# Altium PCB CT310高端控制盒基板电路V1.0.PcbDoc (part 5 of 8)
Units mil, origin at the board's own origin, x right, y up, seen from the top; angles counter-clockwise.
Board outline 8162.61 x 6196.81 mil, 2 copper layers (Top Layer, Bottom Layer), stack 65.792 mil thick; 265 components, 178 nets, 926 pads, 298 vias.
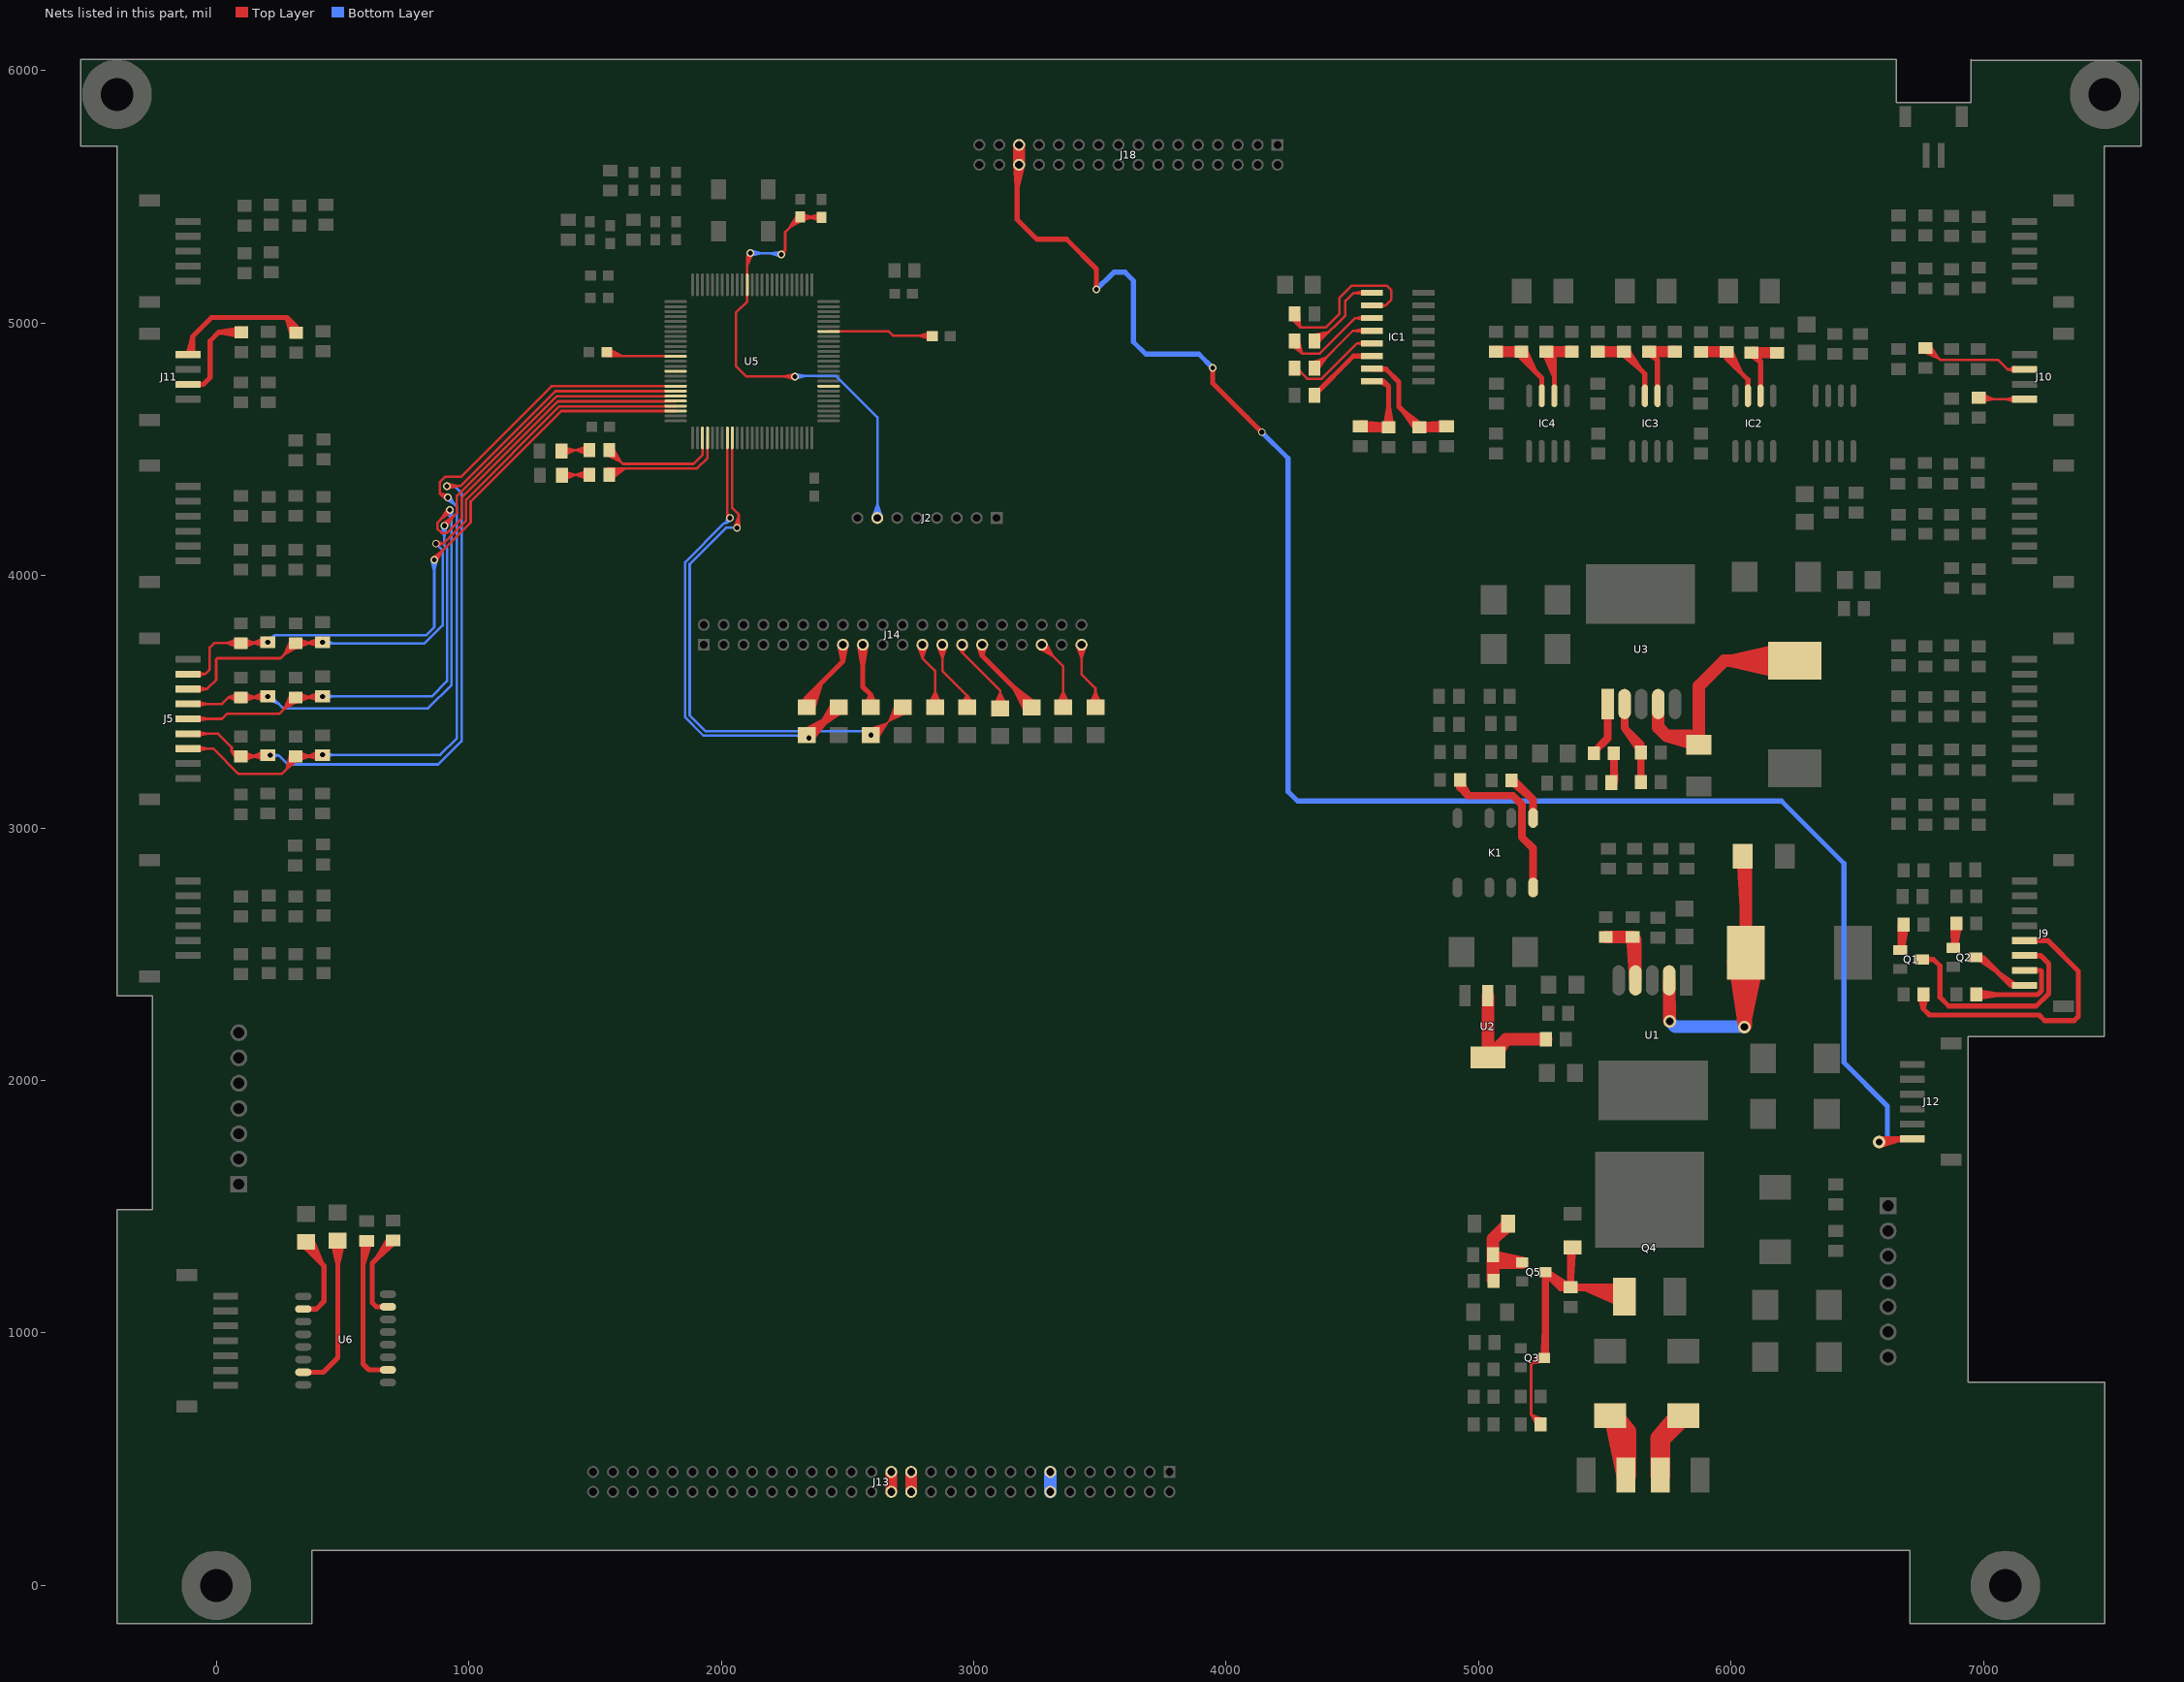
[diagram p5: the nets of this part, all layers, seen from the top]

## Via types
v1: diameter 30, hole 20, Top Layer to Bottom Layer, tented both sides, 226 vias
v2: diameter 60, hole 30, Top Layer to Bottom Layer, tented both sides, 32 vias
v3: diameter 50, hole 30, Top Layer to Bottom Layer, tented both sides, 20 vias
v4: diameter 80, hole 50, Top Layer to Bottom Layer, tented both sides, 10 vias
v5: diameter 50, hole 28, Top Layer to Bottom Layer, tented both sides, 8 vias
v6: diameter 24, hole 16, Top Layer to Bottom Layer, tented both sides, 1 vias
v7: diameter 30, hole 16, Top Layer to Bottom Layer, tented both sides, 1 vias

## Nets (pads, with @x,y where several pads share a name; then routed paths per layer and width w, separated by ;. In a path a pad name is that pad's centre, name@x,y a point inside that pad or via, vN(x,y) a via of type N, cw(c..) or ccw(c..) an arc to the next point about the centre after c; other vN are vias at no path point) (continued)
KJ_B3: C42.1 J5.3 R41.1 U5.43 | length 5962.4
  Top Layer w10: J5.3@-111.93,3314.19 -12.19,3314.19 88,3214 259,3214 305,3260 ; J5.3@-76.5,3314.19 -32.72,3314.19 ; J5.3@-75.62,3305.45 -32.72,3314.19 ; J5.3@-75.62,3322.92 -32.72,3314.19 ; R41.1@292.86,3291.19 278.55,3233.55 ; R41.1@302.38,3287.95 278.55,3233.55 ; R41.1@313.94,3283.93 R41.1@333.93,3283.93 ; R41.1@316.97,3278.84 278.55,3233.55 ; R41.1@317.88,3283.93 371.5,3283.93 ; R41.1@318.57,3275.33 371.5,3283.93 ; R41.1@318.57,3292.52 371.5,3283.93 ; R41.1@321.11,3265.59 371.5,3283.93 ; R41.1@321.11,3302.26 371.5,3283.93 ; R41.1@324.06,3271.71 278.55,3233.55 ; C42.1@410.77,3286.65 C42.1@409.84,3305.92 ; C42.1@412.52,3269.33 360.64,3283.93 ; C42.1@413.07,3296.38 360.64,3283.93 ; C42.1@414.33,3279.24 360.64,3283.93 ; C42.1@414.39,3287.86 360.64,3283.93 ; C42.1@417.92,3299.42 371.73,3282.96 ; C42.1@417.98,3299.43 374.31,3283.93 ; C42.1@418.16,3299.47 375.39,3285.01 ; C42.1@418.5,3299.54 360.64,3283.93 ; C42.1@418.64,3299.57 372.94,3286.85 ; C42.1@419.84,3279.72 372.94,3286.85 ; C42.1@420.23,3279.71 375.39,3285.01 ; C42.1@420.3,3287.86 416.36,3283.93 R41.1@333.93,3283.93 ; C42.1@420.43,3279.71 360.64,3283.93 ; C42.1@420.46,3279.71 374.31,3283.93 ; C42.1@420.65,3279.71 371.73,3282.96 ; C42.1@427.01,3297.12 C42.1@409.84,3305.92 ; v1@911.32,4300.77 885,4325 ; v1@920.18,4318.48 885,4325 ; 1744.15,4749.87 U5.43@1779.9,4749.87 ; U5.43@1819.15,4749.87 1327.87,4749.87 969,4391 906,4391 885,4370 885,4325 ; 278.55,3233.55 R41.1@310.01,3283.93 ; 305,3260 R41.1@310.01,3283.93 ; 305,3260 301.39,3284.17 305,3260 ; 305,3260 318,3280.7 305,3260 ; 305,3260 291.7,3280.51 305,3260 ; 305,3260 325.41,3273.46 305,3260 ; 305,3260 R41.1@310.01,3283.93 ; 305,3260 310,3260 ; 310,3260 R41.1@310.01,3283.93 ; 310,3260 301.52,3282.37 310,3260 ; 310,3260 318.49,3282.37 310,3260 ; 310,3260 292.85,3276.68 310,3260 ; 310,3260 327.16,3276.67 310,3260 ; 310,3260 R41.1@310.01,3283.93 ; 310,3260 R41.1@333.93,3283.93 ; 360.64,3283.93 v1(420.3,3289.7) ; 360.64,3283.93 C42.1@409.84,3305.92 ; 371.73,3282.96 v1(420.3,3289.7) ; 372.94,3286.85 v1(420.3,3289.7) ; 374.31,3283.93 v1(420.3,3289.7) ; 375.39,3285.01 v1(420.3,3289.7) ; C42.1@409.84,3305.92 v1(420.3,3289.7) ; 885,4325 v1(917,4309) ; 885,4325 901,4309 ; 901,4309 v1(917,4309) ; 901,4309 913.88,4318.5 901,4309 ; 901,4309 913.88,4299.5 901,4309 ; 901,4309 v1(917,4309)
  Bottom Layer w10: v1(420.3,3289.7) 886.7,3289.7 953,3356 953,4271.6 942,4282.6 942,4284 ; v1@421.41,3279.77 465.3,3289.7 v1@421.41,3299.64 ; v1@911,4301 942,4284 ; v1(917,4309) 942,4284 ; v1@925,4315 942,4284
KJ_B4: C46.1 J5.4 R49.1 U5.44 | length 5254.5
  Top Layer w10: J5.4@-111.93,3373.24 6.76,3373.24 60.5,3319.5 60.5,3301.5 ; J5.4@-76.5,3373.24 -32.72,3373.24 ; J5.4@-75.62,3364.5 -32.72,3373.24 ; J5.4@-75.62,3381.98 -32.72,3373.24 ; R49.1@80.75,3270.22 60.5,3301.5 ; R49.1@88.44,3276.84 60.5,3301.5 ; R49.1@93.36,3283.93 60.5,3301.5 ; R49.1@96.52,3291.95 60.5,3301.5 ; R49.1@97.76,3302.02 60.5,3301.5 ; R49.1@101.23,3283.93 154.85,3283.93 ; R49.1@101.93,3275.33 154.85,3283.93 ; R49.1@101.93,3292.52 154.85,3283.93 ; R49.1@104.47,3265.59 154.85,3283.93 ; R49.1@104.47,3302.26 154.85,3283.93 ; C46.1@193.2,3305.92 143.96,3283.93 ; C46.1@195.88,3269.33 143.96,3283.93 ; C46.1@206,3294.86 C46.1@197.68,3279.24 ; C46.1@206.39,3280.49 C46.1@196.43,3296.38 ; C46.1@209.89,3278.4 C46.1@197.74,3287.86 ; C46.1@209.89,3297.32 C46.1@197.74,3287.86 ; C46.1@211.26,3297.68 165.94,3283.93 ; C46.1@211.55,3297.73 168.1,3285.69 ; C46.1@212.51,3277.88 168.1,3285.69 ; C46.1@212.91,3277.86 165.94,3283.93 ; C46.1@215.14,3297.66 C46.1@196.43,3296.38 ; C46.1@215.35,3278.11 C46.1@197.68,3279.24 ; v1(913,4354) 966.18,4354 1342.36,4730.18 U5.44@1819.15,4730.18 ; v1@914.11,4344.06 958,4354 v1@914.11,4363.94 ; 1744.15,4730.18 U5.44@1779.9,4730.18 ; 60.5,3301.5 78.07,3283.93 R49.1@97.3,3283.93 199.71,3283.93 C46.1@203.65,3287.86 v1(213.14,3287.86) ; 143.96,3283.93 v1(213.14,3287.86) ; 143.96,3283.93 211.85,3297.78 144.67,3284.09 ; 143.96,3283.93 212.99,3277.86 144.67,3284.09 ; 143.96,3283.93 C46.1@197.74,3287.86 ; 143.96,3283.93 C46.1@196.43,3296.38 ; 143.96,3283.93 C46.1@197.68,3279.24 ; 144.67,3284.09 v1(213.14,3287.86) ; 165.94,3283.93 v1(213.14,3287.86) ; 168.1,3285.69 v1(213.14,3287.86) ; C46.1@196.43,3296.38 v1(213.14,3287.86) ; C46.1@197.68,3279.24 v1(213.14,3287.86) ; C46.1@197.74,3287.86 v1(213.14,3287.86)
  Bottom Layer w10: v1(213.14,3287.86) 247.14,3287.86 ; v1@214.61,3277.97 247.14,3287.86 ; v1@214.61,3297.75 247.14,3287.86 ; v1(913,4354) 943,4354 ; v1@914.67,4344.14 943,4354 ; v1@914.67,4363.86 943,4354 ; 247.14,3287.86 283.3,3251.7 878.7,3251.7 971,3344 971,4326 943,4354
KJ_B5: C35.1 J5.5 R26.1 U5.45 | length 4777
  Top Layer w10: J5.5@-111.93,3432.3 22.3,3432.3 42,3452 248.95,3452 R26.1@313.94,3516.99 416.36,3516.99 v1(420.3,3520.92) ; J5.5@-76.5,3432.3 -32.72,3432.3 ; J5.5@-75.62,3423.56 -32.72,3432.3 ; J5.5@-75.62,3441.03 -32.72,3432.3 ; R26.1@294.48,3527.28 269.11,3472.15 ; R26.1@303.24,3522.33 269.11,3472.15 ; R26.1@310.01,3516.99 269.11,3472.15 ; R26.1@315.95,3510.74 269.11,3472.15 ; R26.1@317.88,3516.99 371.5,3516.99 ; R26.1@318.57,3508.39 371.5,3516.99 ; R26.1@318.57,3525.58 371.5,3516.99 ; R26.1@321.11,3498.65 371.5,3516.99 ; R26.1@321.11,3535.33 371.5,3516.99 ; R26.1@321.67,3502.48 269.11,3472.15 ; C35.1@409.84,3538.98 360.61,3516.99 ; C35.1@412.52,3502.4 360.61,3516.99 ; C35.1@413.07,3529.45 360.61,3516.99 ; C35.1@414.33,3512.3 360.61,3516.99 ; C35.1@414.39,3520.92 360.61,3516.99 ; C35.1@418.22,3530.71 372.66,3515.94 ; C35.1@418.35,3530.73 374.79,3516.99 ; C35.1@418.56,3530.77 375.35,3518.07 ; C35.1@419.01,3530.84 371.93,3519.68 ; C35.1@419.52,3510.95 371.93,3519.68 ; C35.1@419.82,3510.94 375.35,3518.07 ; C35.1@420.06,3510.93 374.79,3516.99 ; C35.1@420.29,3510.92 372.66,3515.94 ; v1@896.51,4204.61 938.32,4233.72 ; v1(903,4197) 938.32,4233.72 ; v1@903,4198.4 953,4248.4 953,4315.37 1348.13,4710.5 U5.45@1819.15,4710.5 ; v1@910.85,4190.81 938.32,4233.72 ; 1744.15,4710.5 U5.45@1779.9,4710.5 ; 371.93,3519.68 v1(420.3,3520.92) ; 372.66,3515.94 v1(420.3,3520.92) ; 374.79,3516.99 v1(420.3,3520.92) ; 375.35,3518.07 v1(420.3,3520.92)
  Bottom Layer w10: v1(420.3,3520.92) 852.92,3520.92 914,3582 914,4107.46 903,4118.46 v1(903,4197) ; v1@421.41,3510.99 465.3,3520.92 v1@421.41,3530.86 ; v1@893.06,4195.89 903,4152 v1@912.94,4195.89
KJ_B6: C39.1 J5.6 R34.1 U5.46 | length 5062.6
  Top Layer w10: J5.6@-111.93,3491.35 22.37,3491.35 48.01,3516.99 ; J5.6@-76.5,3491.35 -32.72,3491.35 ; J5.6@-75.62,3482.62 -32.72,3491.35 ; J5.6@-75.62,3500.09 -32.72,3491.35 ; R34.1@89.53,3498.76 48.01,3516.99 ; R34.1@89.53,3535.21 48.01,3516.99 ; R34.1@92.54,3508.41 48.01,3516.99 ; R34.1@92.54,3525.57 48.01,3516.99 ; R34.1@93.36,3516.99 48.01,3516.99 ; R34.1@101.23,3516.99 154.85,3516.99 ; R34.1@101.93,3508.39 154.85,3516.99 ; R34.1@101.93,3525.58 154.85,3516.99 ; R34.1@104.47,3498.65 154.85,3516.99 ; R34.1@104.47,3535.33 154.85,3516.99 ; C39.1@193.2,3538.98 143.96,3516.99 ; C39.1@195.88,3502.4 143.96,3516.99 ; C39.1@196.43,3529.45 143.96,3516.99 ; C39.1@197.68,3512.3 143.96,3516.99 ; C39.1@197.74,3520.92 143.96,3516.99 ; C39.1@199.71,3516.99 R34.1@97.3,3516.99 48.01,3516.99 ; C39.1@201.58,3530.71 156.01,3515.94 ; C39.1@201.7,3530.73 158.14,3516.99 ; C39.1@201.91,3530.77 158.7,3518.07 ; C39.1@202.36,3530.84 155.29,3519.68 ; C39.1@202.87,3510.95 155.29,3519.68 ; C39.1@203.17,3510.94 158.7,3518.07 ; C39.1@203.42,3510.93 158.14,3516.99 ; C39.1@203.65,3510.92 156.01,3515.94 ; v1@917.15,4266.19 889.73,4223.33 ; v1@931.49,4252.39 889.73,4223.33 ; 1744.14,4689.88 U5.46@1779.9,4690.81 ; U5.46@1819.15,4690.81 1818.21,4689.88 1352.97,4689.88 971,4307.91 971,4225.4 914.6,4169 891.4,4169 875,4185.4 875,4208.6 884.7,4218.3 925,4258.6 v1(925,4260) 889.73,4223.33 ; 155.29,3519.68 v1(203.65,3520.92) ; 156.01,3515.94 v1(203.65,3520.92) ; 158.14,3516.99 v1(203.65,3520.92) ; 158.7,3518.07 v1(203.65,3520.92)
  Bottom Layer w10: v1@198.89,3512.13 247.41,3491.59 ; v1@209.98,3528.66 247.41,3491.59 ; v1@915.31,4257.52 932,4212.47 ; v1@934.99,4260.42 932,4212.47 ; 247.41,3491.59 v1(203.65,3520.92) 218.08,3520.92 265,3474 839,3474 932,3567 932,4253 v1(925,4260) 932,4212.47
KJ_B7: C43.1 J5.7 R42.1 U5.47 | length 4466.5
  Top Layer w10: J5.7@-111.93,3550.41 -36.59,3550.41 ; J5.7@-76.5,3550.41 -36.59,3550.41 ; J5.7@-75.53,3541.68 -36.59,3550.41 ; J5.7@-75.53,3559.13 -36.59,3550.41 ; R42.1@294.48,3742.28 269.11,3687.15 ; R42.1@303.24,3737.33 269.11,3687.15 ; R42.1@310.01,3731.99 269.11,3687.15 ; R42.1@315.95,3725.74 269.11,3687.15 ; R42.1@317.88,3731.99 371.5,3731.99 ; R42.1@318.57,3723.39 371.5,3731.99 ; R42.1@318.57,3740.58 371.5,3731.99 ; R42.1@321.11,3713.65 371.5,3731.99 ; R42.1@321.11,3750.33 371.5,3731.99 ; R42.1@321.67,3717.48 269.11,3687.15 ; C43.1@409.84,3753.98 360.61,3731.99 ; C43.1@412.52,3717.4 360.61,3731.99 ; C43.1@413.07,3744.45 360.61,3731.99 ; C43.1@414.33,3727.3 360.61,3731.99 ; C43.1@414.39,3735.92 360.61,3731.99 ; C43.1@416.36,3731.99 R42.1@313.94,3731.99 253.95,3672 4,3672 -1,3667 -1,3586 -36.59,3550.41 ; C43.1@418.22,3745.71 372.66,3730.94 ; C43.1@418.35,3745.73 374.79,3731.99 ; C43.1@418.56,3745.77 375.35,3733.07 ; C43.1@419.01,3745.84 371.93,3734.68 ; C43.1@419.52,3725.95 371.93,3734.68 ; C43.1@419.82,3725.94 375.35,3733.07 ; C43.1@420.06,3725.93 374.79,3731.99 ; C43.1@420.29,3725.92 372.66,3730.94 ; v1(870,4126) 897.05,4126 ; v1@871.85,4116.17 897.05,4126 ; v1@871.85,4135.83 897.05,4126 ; 1744.14,4670.19 U5.47@1779.9,4671.13 ; U5.47@1819.15,4671.13 1818.21,4670.19 1358.74,4670.19 989,4300.46 989,4217.95 897.05,4126 ; 371.93,3734.68 v1(420.3,3735.92) ; 372.66,3730.94 v1(420.3,3735.92) ; 374.79,3731.99 v1(420.3,3735.92) ; 375.35,3733.07 v1(420.3,3735.92)
  Bottom Layer w10: v1@420.31,3725.92 466.35,3731 ; v1@422.43,3745.69 466.35,3731 ; v1(870,4126) 896,4100 896,3802.54 824.46,3731 425.22,3731 v1(420.3,3735.92) 466.35,3731
KJ_B8: C47.1 J5.8 R50.1 U5.48 | length 4442.3
  Top Layer w10: J5.8@-111.93,3609.46 -44.54,3609.46 ; J5.8@-76.5,3609.46 -44.54,3609.46 ; J5.8@-75.29,3600.76 -44.54,3609.46 ; J5.8@-75.29,3618.16 -44.54,3609.46 ; R50.1@90.12,3713.65 39.74,3731.99 ; R50.1@90.12,3750.33 39.74,3731.99 ; R50.1@92.67,3723.39 39.74,3731.99 ; R50.1@92.67,3740.58 39.74,3731.99 ; R50.1@93.36,3731.99 39.74,3731.99 ; R50.1@101.23,3731.99 154.85,3731.99 ; R50.1@101.93,3723.39 154.85,3731.99 ; R50.1@101.93,3740.58 154.85,3731.99 ; R50.1@104.47,3713.65 154.85,3731.99 ; R50.1@104.47,3750.33 154.85,3731.99 ; C47.1@193.2,3753.98 143.96,3731.99 ; C47.1@195.88,3717.4 143.96,3731.99 ; C47.1@196.43,3744.45 143.96,3731.99 ; C47.1@197.68,3727.3 143.96,3731.99 ; C47.1@197.74,3735.92 143.96,3731.99 ; C47.1@201.58,3745.71 156.01,3730.94 ; C47.1@201.7,3745.73 158.14,3731.99 ; C47.1@201.91,3745.77 158.7,3733.07 ; C47.1@202.36,3745.84 155.29,3734.68 ; C47.1@202.87,3725.95 155.29,3734.68 ; C47.1@203.17,3725.94 158.7,3733.07 ; C47.1@203.42,3725.93 158.14,3731.99 ; C47.1@203.65,3725.92 156.01,3730.94 ; v1@856.19,4069.32 896.9,4100.39 ; v1@871.11,4056.14 896.9,4100.39 ; 1744.15,4651.44 U5.48@1779.9,4651.44 ; U5.48@1819.15,4651.44 1365.44,4651.44 1007,4293 1007,4210.49 863,4066.49 v1(863,4062) 896.9,4100.39 ; -44.54,3609.46 -26,3628 -26,3715 -9.01,3731.99 R50.1@97.3,3731.99 199.71,3731.99 v1(203.65,3735.92) ; 155.29,3734.68 v1(203.65,3735.92) ; 156.01,3730.94 v1(203.65,3735.92) ; 158.14,3731.99 v1(203.65,3735.92) ; 158.7,3733.07 v1(203.65,3735.92)
  Bottom Layer w10: v1@197.53,3743.83 231.65,3763.92 ; v1(203.65,3735.92) 231.65,3763.92 ; v1@211.56,3729.8 231.65,3763.92 ; v1@853.06,4060.89 863,4017 v1@872.94,4060.89 ; v1(863,4062) 863,3795 831.92,3763.92 231.65,3763.92
LCD_ONOFF: R45.2 R54.2 U5.58 | length 3143
  Top Layer w10: 2023.87,4470.15 U5.58@2023.87,4505.9 ; U5.58@2023.87,4545.15 2023.87,4270.87 2023,4270 2023,4244 ; 2023,4244 v1(2034,4228) ; 2023,4244 2040.5,4235.6 2023,4244 ; 2023,4244 2024.58,4224.65 2023,4244 ; 2023,4244 v1(2034,4228) ; 2023,4244 2034,4233 v1(2034,4228)
  Top Layer w20: R54.2@2330.15,3385.66 2422.96,3435.71 ; R54.2@2338.3,3367.88 2355.14,3367.88 R45.2@2465.37,3478.12 ; R54.2@2342.23,3367.88 2422.96,3435.71 ; R54.2@2357.67,3352.92 2422.96,3435.71 ; 2402.6,3415.34 v1(2347,3356) ; 2402.96,3418.9 v1(2347,3356) ; 2406.24,3414.51 v1(2347,3356) ; R45.2@2444.35,3491.17 2391.45,3404.2 ; R45.2@2461.44,3478.12 2391.45,3404.2 ; R45.2@2475.4,3461.77 2391.45,3404.2
  Bottom Layer w10: v1@2025.04,4232.44 2018,4207 ; v1@2040.66,4220.54 2018,4207 ; v1@2344.13,3346.42 2296.14,3366 ; v1@2347.97,3365.95 2296.14,3366 ; 2018,4207 v1(2034,4228) 2034,4223 2018,4207 ; 2018,4207 2011.54,4207 1857,4052.46 1857,3438.54 1929.54,3366 2337,3366 v1(2347,3356) 2296.14,3366
LCD_PWM: R53.2 R58.2 U5.59 | length 4494.2
  Top Layer w10: 2043.56,4470.15 U5.59@2043.56,4505.9 ; U5.59@2043.56,4545.15 2043.56,4267.44 2069,4242 2069,4196 v1(2062,4189) 2069,4235.44 ; v1@2052.33,4191.53 2069,4235.44 ; v1@2071.99,4188.57 2069,4235.44 ; R58.2@2583.96,3391.28 2655.91,3414.5 ; R58.2@2586.56,3375.97 2632.79,3403.45 ; R58.2@2587.1,3376.33 2631.05,3398.27 ; R58.2@2587.55,3376.6 2632.3,3396.01 ; R58.2@2587.7,3381.9 2655.91,3414.5 ; R58.2@2588.19,3376.93 2640.86,3396.18 ; R58.2@2588.63,3358.64 R58.2@2607.92,3356.08 ; R58.2@2592.61,3373.16 2655.91,3414.5 ; R58.2@2596.39,3367.88 2655.91,3414.5 ; R58.2@2598.25,3359.73 2640.86,3396.18 ; R58.2@2598.54,3359.95 2637.94,3396.53 ; R58.2@2598.64,3360.03 2635.25,3395.24 ; R58.2@2599.03,3360.35 2632.3,3396.01 ; R58.2@2599.4,3360.69 2631.05,3398.27 ; R58.2@2599.73,3361.03 2632.79,3403.45 ; R58.2@2600.36,3374.01 R58.2@2607.92,3356.08 ; R58.2@2600.61,3362.94 2655.91,3414.5 ; R58.2@2616.13,3350.21 2655.91,3414.5 ; R53.2@2693.16,3492.22 2666.82,3425.41 ; R53.2@2702.28,3487.86 2666.82,3425.41 ; R53.2@2710.63,3482.31 2666.82,3425.41 ; R53.2@2715.59,3478.12 2666.82,3425.41 ; R53.2@2719.53,3478.12 R58.2@2609.29,3367.88 ; R53.2@2720.16,3473.5 2666.82,3425.41 ; R53.2@2726.33,3465.6 2666.82,3425.41 ; R53.2@2731.39,3456.84 2666.82,3425.41 ; v1(2592.45,3367.88) 2635.25,3395.24 ; v1(2592.45,3367.88) R58.2@2607.92,3356.08 ; v1(2592.45,3367.88) 2640.86,3396.18 ; v1(2592.45,3367.88) R58.2@2609.29,3367.88 ; v1(2592.45,3367.88) 2637.94,3396.53 ; v1(2592.45,3367.88) 2632.3,3396.01 ; v1(2592.45,3367.88) 2631.05,3398.27 ; v1(2592.45,3367.88) 2632.79,3403.45 ; v1(2592.45,3367.88) R58.2@2609.29,3367.88 ; R58.2@2607.92,3356.08 2655.91,3414.5 ; R58.2@2609.29,3367.88 2595.42,3358.33 R58.2@2609.29,3367.88 ; R58.2@2609.29,3367.88 2595.42,3377.43 R58.2@2609.29,3367.88 ; 2635.25,3395.24 2587.92,3376.8 2637.94,3396.53
  Bottom Layer w10: v1(2062,4189) 2019,4189 1875,4045 1875,3446 1937,3384 2576.33,3384 ; v1@2584,3362.53 2576.33,3384 ; v1@2597.8,3376.33 2576.33,3384 ; 2576.33,3384 v1(2592.45,3367.88) 2576.33,3384
LED1: R100.1 U5.53 | length 805.8
  Top Layer w10: R100.1@1546.28,4476.84 1601.41,4451.46 ; R100.1@1551.23,4485.59 1601.41,4451.46 ; R100.1@1556.57,4492.36 1601.41,4451.46 ; R100.1@1556.57,4496.29 1610.87,4442 1890,4442 1925.3,4477.3 ; R100.1@1562.82,4498.3 1601.41,4451.46 ; R100.1@1571.08,4504.03 1601.41,4451.46 ; U5.53@1925.45,4505.9 1925.3,4477.3 ; U5.53@1925.45,4545.15 1925.3,4545 1925.3,4477.3
LED2: R101.1 U5.54 | length 862.6
  Top Layer w10: R101.1@1551.57,4424.69 1552.26,4424 1904,4424 1945.13,4465.13 U5.54@1945.13,4545.15 ; R101.1@1552.02,4416.75 1618.82,4424 ; R101.1@1553.84,4406.87 1618.82,4424 ; R101.1@1556.57,4398.69 1618.82,4424 ; R101.1@1560.32,4390.93 1618.82,4424 ; R101.1@1565.91,4382.58 1618.82,4424 ; 1945.13,4470.15 U5.54@1945.13,4505.9
LINE_IN_L: J12.6 J18.27 J18.28 | length 8940.8
  Top Layer w20: J18.28@3166.12,5627.07 3172,5541.87 ; J18.28@3166.17,5625.75 J18.27@3166.17,5704.49 ; J18.28@3166.17,5628.1 J18.27@3179.74,5705.67 ; J18.28@3166.58,5630.42 J18.27@3193.31,5704.49 ; J18.28@3192.91,5630.42 J18.27@3166.17,5704.49 ; J18.28@3193.17,5624.61 3172,5541.87 ; J18.28@3193.31,5625.75 J18.27@3193.31,5704.49 ; J18.28@3193.31,5628.1 J18.27@3179.74,5705.67 ; v1(3486,5133) 3486,5213.53 3367.53,5332 3250,5332 3172,5410 3172,5619.18 J18.28@3179.74,5626.93 ; 4083.57,4625.43 v1(4141,4568) 3947,4762 ; v5@6589.32,1741.37 J12.6@6674.48,1768.36 ; v5@6589.38,1741.39 J12.6@6672.62,1768.36 ; 6608.02,1768.36 J12.6@6681.8,1768.36 ; J12.6@6717.23,1768.36 6598.36,1768.36 v5(6586,1756) ; J18.27@3166.17,5704.49 J18.28@3179.74,5626.93 ; 3172,5541.87 J18.28@3179.74,5626.93 ; J18.28@3179.74,5626.93 J18.27@3193.31,5704.49 ; J18.28@3179.74,5626.93 J18.27@3179.74,5705.67 ; 3947,4762 v1(3947,4822) 3947,4762 ; v5(6586,1756) J12.6@6672.62,1768.36 ; v5(6586,1756) J12.6@6674.48,1768.36 ; J12.6@6672.62,1768.36 6585.16,1770.98 J12.6@6674.48,1768.36
  Bottom Layer w20: v1(3486,5133) 3543.82,5189.82 ; v1@3486.5,5132.5 3555,5201 3599.67,5201 3632.83,5167.83 3632.83,4925.17 3681,4877 3892,4877 v1(3947,4822) ; v1(4141,4568) 4245,4464 4245,3143.62 4282,3106.62 6199.38,3106.62 6447,2859 6447,2070.6 6619,1898.6 6619,1765 ; v5(6586,1756) 6619,1765 ; v5(6586,1756) 6619,1765 ; v5(6586,1756) 6610,1756 6619,1765 ; 6619,1765 6593.02,1742.75 6619,1765 ; 6619,1765 6585.32,1770.98 6619,1765
LINK&ACT: J13.13 J13.14 | length 78.7
  Bottom Layer w50: J13.14@3303.22,370.69 J13.13@3303.22,449.43
LJ_G1: J9.6 Q1.3 | length 963.1
  Top Layer w20: Q1.3@6756.76,2479.29 6801.71,2479.29 ; Q1.3@6764.64,2479.29 6801.71,2479.29 ; J9.6@7162.52,2494.71 7225.88,2494.71 ; J9.6@7197.96,2494.71 7225.88,2494.71 ; 6801.71,2479.29 6827,2454 6827,2329.58 6861.85,2294.74 7208.7,2294.74 7257.74,2343.77 7257.74,2462.85 7225.88,2494.71
LJ_G2: J9.8 Q2.3 | length 495
  Top Layer w20: Q2.3@6966.76,2487.29 6997.3,2487.29 ; 7050.13,2434.46 Q2.3@6974.64,2487.29 ; 7063.42,2421.17 J9.8@7127.09,2376.6 ; J9.8@7162.52,2376.6 7107.99,2376.6 ; Q2.3@6974.64,2487.29 6997.3,2487.29 ; Q2.3@6974.64,2487.29 6997.3,2487.29 ; 6997.3,2487.29 7107.99,2376.6 ; 7107.99,2376.6 J9.8@7127.09,2376.6 ; 7107.99,2376.6 J9.8@7127.09,2376.6
MD_USBDN: J13.29 J13.30 | length 708.7
  Top Layer w20: J13.30@2659.73,369.51 J13.29@2659.73,448.25 ; J13.30@2659.73,371.86 J13.29@2673.3,449.43 ; J13.30@2660.13,374.18 J13.29@2686.87,448.25 ; J13.30@2686.46,374.18 J13.29@2659.73,448.25 ; J13.30@2686.87,369.51 J13.29@2686.87,448.25 ; J13.30@2686.87,371.86 J13.29@2673.3,449.43 ; J13.29@2659.73,448.25 J13.30@2673.3,370.69 ; J13.30@2673.3,370.69 J13.29@2686.87,448.25 ; J13.30@2673.3,370.69 J13.29@2673.3,449.43
MD_USBDP: J13.27 J13.28 | length 708.7
  Top Layer w20: J13.28@2738.47,369.51 J13.27@2738.47,448.25 ; J13.28@2738.47,371.86 J13.27@2752.04,449.43 ; J13.28@2738.87,374.18 J13.27@2765.61,448.25 ; J13.28@2765.2,374.18 J13.27@2738.47,448.25 ; J13.28@2765.61,369.51 J13.27@2765.61,448.25 ; J13.28@2765.61,371.86 J13.27@2752.04,449.43 ; J13.27@2738.47,448.25 J13.28@2752.04,370.69 ; J13.28@2752.04,370.69 J13.27@2765.61,448.25 ; J13.28@2752.04,370.69 J13.27@2752.04,449.43
MT1_CTRL: U5.40 | length 1.3
  Top Layer w10: U5.40@1818.21,4809.86 U5.40@1819.15,4808.92
MT2_CTRL: U5.83
NetC12_2: C12.2 D6.2 Q5.1 R20.2 | length 1236.7
  Top Layer w50: C12.2@5056.67,1315.2 5056.67,1372.74 ; R20.2@5058.67,1206.3 R20.2@5056.67,1208.3 ; D6.2@5117.22,1425.42 5056.67,1372.74 ; D6.2@5117.22,1433.3 5056.67,1372.74 ; R20.2@5056.67,1208.3 C12.2@5056.67,1303.39 ; R20.2@5056.67,1208.3 C12.2@5056.67,1309.3 ; C12.2@5056.67,1303.39 5087.17,1278.8 ; C12.2@5056.67,1303.39 5168.11,1278.8 5087.17,1278.8 ; C12.2@5056.67,1303.39 5087.17,1278.8 ; C12.2@5056.67,1303.39 Q5.1@5172.05,1278.8 5087.17,1278.8 ; C12.2@5056.67,1303.39 5058.67,1210.23 C12.2@5056.67,1309.3 ; C12.2@5056.67,1303.39 5087.17,1278.8 ; C12.2@5056.67,1309.3 5056.67,1372.74 ; C12.2@5056.67,1309.3 5087.17,1278.8
NetC75_2: C75.2 R30.2 | length 438.9
  Top Layer w30: C75.2@5534.67,3178.3 C75.2@5535.54,3179.17 ; C75.2@5535.54,3179.17 5535.54,3291.96 5539.37,3189.91 R30.2@5535.54,3295.9 C75.2@5535.54,3179.17
NetC76_1: C76.1 U6.2 | length 938.4
  Top Layer w20: C76.1@582.43,1365.84 581,1272.95 ; C76.1@609.25,1361.45 581,1272.95 ; U6.2@662.06,853.5 604.5,853.5 ; U6.2@679.58,853.5 604.5,853.5 ; 581,1272.95 C76.1@596,1364.63 581,1349.63 581,877 604.5,853.5
NetC85_1: C85.1 U6.7 | length 644.9
  Top Layer w20: U6.7@662.06,1103.5 633.5,1103.5 ; U6.7@679.58,1103.5 633.5,1103.5 ; C85.1@682.85,1374.32 638.55,1297.55 ; C85.1@694.09,1366.63 638.55,1297.55 ; C85.1@700,1366.63 700,1359 617,1276 617,1120 633.5,1103.5 ; C85.1@704.02,1357.3 638.55,1297.55
NetC105_1: C105.1 IC1.3 | length 767.1
  Top Layer w10: C105.1@4257.19,4910.51 4300.3,4879.3 ; C105.1@4263.84,4918.08 4300.3,4879.3 ; C105.1@4270.58,4923.45 4300.3,4879.3 ; C105.1@4270.58,4929.36 4270.58,4909.01 4300.3,4879.3 ; C105.1@4278.1,4927.67 4300.3,4879.3 ; C105.1@4287.61,4930.99 4300.3,4879.3 ; IC1.3@4544.77,5012.52 4510.79,5019.3 ; IC1.3@4544.77,5026.07 4510.79,5019.3 ; IC1.3@4545.44,5019.3 4510.79,5019.3 ; IC1.3@4576.93,5019.3 4510.79,5019.3 ; 4300.3,4879.3 4370.79,4879.3 4510.79,5019.3
NetC105_2: C105.2 IC1.1 | length 761
  Top Layer w10: C105.2@4343.37,4952.91 4406.32,4964.32 ; C105.2@4345.93,4943.19 4406.32,4964.32 ; C105.2@4349.32,4935.26 4406.32,4964.32 ; C105.2@4353.74,4927.86 4406.32,4964.32 ; C105.2@4360.1,4920.08 4406.32,4964.32 ; C105.2@4371.36,4929.36 4472,5030 4472,5087 4504.3,5119.3 ; IC1.1@4544.87,5112.51 4504.3,5119.3 ; IC1.1@4544.87,5126.08 4504.3,5119.3 ; IC1.1@4545.44,5119.3 4504.3,5119.3 ; IC1.1@4576.93,5119.3 4504.3,5119.3
NetC106_1: C106.1 IC1.5 | length 463.3
  Top Layer w10: C106.1@4270.58,4821.83 4277.78,4821.83 4320.31,4779.3 4378.33,4779.3 4518.32,4919.3 ; IC1.5@4544.58,4912.54 4518.32,4919.3 ; IC1.5@4544.58,4926.05 4518.32,4919.3 ; IC1.5@4545.44,4919.3 4518.32,4919.3 ; IC1.5@4576.93,4919.3 4518.32,4919.3
NetC106_2: C106.2 IC1.4 | length 705.5
  Top Layer w10: C106.2@4340.53,4844.15 4396.62,4863.62 ; C106.2@4344.62,4834.96 4396.62,4863.62 ; C106.2@4349.32,4827.73 4396.62,4863.62 ; C106.2@4354.83,4821.83 4502.3,4969.3 IC1.4@4576.93,4969.3 ; C106.2@4355.01,4821.26 4396.62,4863.62 ; C106.2@4362.76,4814.85 4396.62,4863.62 ; IC1.4@4544.88,4962.51 4503.63,4969.3 ; IC1.4@4544.88,4976.08 4503.63,4969.3 ; IC1.4@4545.44,4969.3 4503.63,4969.3
NetC107_1: C107.1 IC1.6 | length 332.9
  Top Layer w20: C107.1@4349.32,4714.3 4504.32,4869.3 ; IC1.6@4545.44,4869.3 4504.32,4869.3 ; IC1.6@4576.93,4869.3 4504.32,4869.3
NetC108_2: C108.2 IC1.2 | length 1259.1
  Top Layer w10: C108.2@4255.32,5020.31 4293.3,4982.3 ; C108.2@4263.08,5026.72 4293.3,4982.3 ; C108.2@4270.58,5036.89 4270.58,5005.01 ; C108.2@4278.66,5033.99 4293.3,4982.3 ; C108.2@4288.56,5035.81 4293.3,4982.3 ; IC1.2@4576.93,5069.3 4631.3,5069.3 ; IC1.2@4608.43,5069.3 4631.3,5069.3 ; IC1.2@4609.44,5062.56 4631.3,5069.3 ; IC1.2@4609.44,5076.03 4631.3,5069.3 ; 4270.58,5005.01 C108.2@4270.58,5030.98 ; 4270.58,5005.01 4262.08,5029.55 4270.58,5005.01 ; 4270.58,5005.01 4279.08,5029.55 4270.58,5005.01 ; 4270.58,5005.01 4253.19,5024.31 4270.58,5005.01 ; 4270.58,5005.01 4287.96,5024.31 4270.58,5005.01 ; 4270.58,5005.01 C108.2@4270.58,5030.98 ; 4270.58,5005.01 4293.3,4982.3 ; C108.2@4270.58,5030.98 4293.3,4982.3 ; 4293.3,4982.3 4394.3,4982.3 4448,5036 4448,5098 4498.3,5148.3 4635.7,5148.3 4654.3,5129.7 4654.3,5092.3 4631.3,5069.3
NetC109_1: C109.1 IC1.8 R103.1 | length 1855.9
  Top Layer w20: C109.1@4531.3,4590.6 4535.23,4586.67 R103.1@4643.29,4586.67 4643.29,4749.71 ; C109.1@4535.94,4577.04 R103.1@4620.04,4576.08 ; C109.1@4537.15,4604.22 R103.1@4623.16,4597.76 ; C109.1@4539.4,4577.16 R103.1@4623.16,4597.76 ; C109.1@4540.63,4603.78 R103.1@4620.04,4576.08 ; IC1.8@4576.93,4769.3 4623.7,4769.3 ; R103.1@4629.72,4587.77 4643.29,4670.29 R103.1@4656.87,4587.77 ; R103.1@4638.25,4573.09 C109.1@4555.74,4586.67 ; R103.1@4638.25,4600.24 C109.1@4555.74,4586.67 ; R103.1@4639.36,4586.67 C109.1@4555.74,4586.67 ; C109.1@4537.2,4590.6 R103.1@4620.99,4586.67 ; C109.1@4537.2,4590.6 R103.1@4621.57,4586.67 ; C109.1@4537.2,4590.6 R103.1@4623.16,4597.76 ; C109.1@4537.2,4590.6 R103.1@4620.04,4576.08 ; IC1.8@4608.43,4769.3 4623.7,4769.3 ; IC1.8@4608.43,4769.3 4623.7,4769.3 ; IC1.8@4608.43,4769.3 4643.29,4749.71 ; R103.1@4620.99,4586.67 4537.67,4576.99 R103.1@4621.57,4586.67 ; R103.1@4620.99,4586.67 4538.94,4604.11 R103.1@4621.57,4586.67 ; 4623.7,4769.3 4643.29,4749.71
NetC111_1: C111.1 IC1.7 R102.1 | length 2001.9
  Top Layer w20: IC1.7@4576.93,4819.3 4578.93,4817.3 4632.7,4817.3 ; IC1.7@4608.43,4819.3 4632.7,4817.3 ; R102.1@4750.76,4578.1 4699.25,4652.71 ; R102.1@4761.36,4586.67 4699.25,4652.71 ; R102.1@4765.29,4586.67 4683.3,4668.66 4683.3,4766.7 4632.7,4817.3 ; R102.1@4769.23,4586.67 C111.1@4853.03,4590.6 ; R102.1@4769.23,4590.6 C111.1@4873.29,4590.6 ; R102.1@4769.7,4600.28 C111.1@4853.03,4590.6 ; R102.1@4770.55,4596.72 4699.25,4652.71 ; R102.1@4770.97,4573.15 C111.1@4853.03,4590.6 ; C111.1@4863.96,4603.78 R102.1@4784.03,4575.93 ; C111.1@4864.99,4577.19 R102.1@4783.83,4598.64 ; C111.1@4865.75,4604.12 R102.1@4783.78,4587.35 ; C111.1@4866.28,4577.02 R102.1@4783.77,4590.6 ; C111.1@4866.28,4604.18 R102.1@4783.77,4590.6 ; C111.1@4866.81,4576.99 R102.1@4783.78,4587.35 ; C111.1@4867.59,4604.22 R102.1@4783.83,4598.64 ; C111.1@4868.66,4577.04 R102.1@4784.03,4575.93 ; R102.1@4783.78,4587.35 C111.1@4867.39,4590.6 ; R102.1@4783.77,4590.6 C111.1@4867.39,4590.6 ; R102.1@4783.83,4598.64 C111.1@4867.39,4590.6 ; R102.1@4784.03,4575.93 C111.1@4867.39,4590.6
NetD1_1: D1.1 F1.2 | length 1013.1
  Top Layer w80: D1.1@5520.29,672.34 5584.04,608.6 ; D1.1@5534.07,672.34 5584.04,468.79 5584.04,608.6 ; D1.1@5534.07,672.34 5584.04,608.6 ; D1.1@5534.07,672.34 F1.2@5584.04,437.3 5584.04,608.6 ; D1.1@5534.07,672.34 5584.04,608.6
NetD2_1: D2.1 F2.2 | length 504.4
  Top Layer w80: F2.2@5719.55,437.3 5719.55,581.6 ; F2.2@5719.55,468.79 5719.55,581.6 ; D2.1@5796.52,672.34 5719.55,581.6 ; D2.1@5810.3,672.34 5719.55,581.6
NetD3_1: D3.1 Q3.3 Q4.1 Q5.3 R12.2 R18.2 | length 2914.7
  Top Layer w10: R18.2@5230.9,630.88 5208,675.96 ; R18.2@5239.39,636.32 5208,675.96 ; R18.2@5245.67,638.3 5208,675.96 ; R18.2@5245.67,642.23 5208,675.96 ; Q3.3@5247.29,912.9 5208,877 ; R18.2@5250.85,649.12 5208,675.96 ; R18.2@5255.32,658.16 5208,675.96 ; Q3.3@5259.55,900.8 5231.8,900.8 ; Q3.3@5260.3,886.88 5208,877 ; 5208,675.96 5208,877 ; 5208,877 Q3.3@5255.61,900.8 ; 5208,877 5231.8,900.8 ; 5231.8,900.8 Q3.3@5255.61,900.8 ; 5231.8,900.8 5251.08,914.76 5231.8,900.8 ; 5231.8,900.8 5251.08,886.83 5231.8,900.8 ; 5231.8,900.8 Q3.3@5255.61,900.8
  Top Layer w30: Q3.3@5259.55,900.8 5264.55,1011.22 ; Q3.3@5264.55,905.8 Q5.3@5264.55,1240.8 ; 5364.41,1220.04 D3.1@5371.3,1338.37 ; D3.1@5364.41,1331.48 R12.2@5364.41,1180.73 ; R12.2@5368.34,1180.73 5481.96,1180.73 ; Q4.1@5567.47,1114.6 5419.85,1180.73 ; Q4.1@5581.46,1174.03 5419.85,1180.73 ; Q5.3@5264.55,1240.8 R12.2@5360.47,1180.73 ; Q5.3@5264.55,1240.8 5324.61,1180.73 ; 5324.61,1180.73 5268.48,1240.8 R12.2@5360.47,1180.73 ; 5324.61,1180.73 R12.2@5360.47,1180.73 ; 5324.61,1180.73 R12.2@5360.47,1180.73 ; 5324.61,1180.73 R12.2@5364.41,1180.73 ; R12.2@5364.41,1180.73 5540.22,1180.73 Q4.1@5577.3,1143.65 5419.85,1180.73
NetD7_2: D7.2 L2.2 U1.2 | length 3438.1
  Top Layer w50: L2.2@6008.2,2469.28 6057.7,2250 ; L2.2@6023.21,2402.79 v3(6052,2212) ; D7.2@6046.62,2877.45 6057.7,2686.88 ; D7.2@6046.62,2887.3 6057.7,2876.22 L2.2@6057.7,2506.3 6057.7,2217.7 v3(6052,2212) ; 6057.7,2387.53 v3(6052,2212) ; 6057.7,2387.69 v3(6052,2212) ; L2.2@6057.7,2474.8 6057.7,2250 ; 6087.95,2384.04 v3(6052,2212) ; L2.2@6107.19,2469.28 6057.7,2250 ; v3@5754.63,2236.63 5754.63,2361.3 v3(5756.96,2234.3) ; v3@5754.63,2236.63 U1.2@5754.63,2396.3 v3(5756.96,2234.3) ; v3@5754.63,2236.63 v3(5756.96,2234.3) ; v3(6052,2212) 6057.7,2250 ; v3(6052,2212) 6057.7,2250 ; v3(6052,2212) 6057.7,2250
  Bottom Layer w50: v3(5756.96,2234.3) 5777.26,2214 v3@6052,2214 ; 5876.93,2214 v3(6052,2212)
NetD8_1: D8.1 L3.2 U3.4 | length 1789.2
  Top Layer w50: U3.4@5711.17,3455.9 5711.17,3398.42 ; U3.4@5711.17,3490.9 5711.17,3398.42 ; D8.1@5862.45,3329.97 5745.3,3364.3 ; L3.2@6215.05,3612.4 5995.77,3661.89 ; L3.2@6215.05,3711.39 5995.77,3661.89 ; L3.2@6220.57,3661.89 5995.77,3661.89 ; L3.2@6252.07,3661.89 5971.94,3661.89 5872.3,3562.25 D8.1@5872.3,3329.97 5837.97,3364.3 5745.3,3364.3 ; 5711.17,3398.42 5745.3,3364.3
NetD60_2: D60.2 R100.2 | length 591.8
  Top Layer w10: D60.2@1366.6,4492.29 1420.48,4496.29 ; D60.2@1366.65,4500.92 1420.48,4496.29 ; D60.2@1367.93,4483.77 1420.48,4496.29 ; D60.2@1368.45,4510.83 1420.48,4496.29 ; D60.2@1370.6,4496.29 R100.2@1477.83,4496.29 ; D60.2@1371.16,4474.24 1420.48,4496.29 ; R100.2@1474.6,4477.96 1424.21,4496.29 ; R100.2@1474.6,4514.63 1424.21,4496.29 ; R100.2@1477.14,4487.7 1424.21,4496.29 ; R100.2@1477.14,4504.89 1424.21,4496.29
NetD61_2: D61.2 R101.2 | length 590.3
  Top Layer w10: D61.2@1368.57,4396.69 1422.25,4398.69 ; D61.2@1368.94,4405.3 1422.25,4398.69 ; D61.2@1369.58,4388.13 1422.25,4398.69 ; D61.2@1370.57,4398.69 R101.2@1477.83,4398.69 ; D61.2@1371.11,4415.14 1422.25,4398.69 ; D61.2@1372.48,4378.48 1422.25,4398.69 ; R101.2@1474.6,4380.35 1424.21,4398.69 ; R101.2@1474.6,4417.03 1424.21,4398.69 ; R101.2@1477.14,4390.1 1424.21,4398.69 ; R101.2@1477.14,4407.28 1424.21,4398.69
NetIC2_6: IC2.6 R109.2 R117.2 | length 1759.3
  Top Layer w20: R117.2@6076.17,4872.23 6116.72,4846.94 ; R117.2@6086.06,4869.07 R109.2@6168.57,4882.64 ; R117.2@6086.06,4896.22 R109.2@6168.57,4882.64 ; R117.2@6096.32,4890.16 6116.72,4846.94 ; IC2.6@6116.72,4712.05 6116.72,4846.94 ; IC2.6@6116.72,4745.05 6116.72,4817.05 ; R109.2@6174.87,4868.41 R117.2@6095.09,4894.74 ; R109.2@6175.18,4894.96 R117.2@6094.71,4870.49 ; R109.2@6178.78,4868.04 R117.2@6094.71,4870.49 ; R109.2@6179.1,4895.23 R117.2@6095.09,4894.74 ; R109.2@6182.01,4881.65 6181.02,4882.64 R117.2@6081.01,4882.64 6116.72,4846.94 ; R117.2@6094.44,4882.64 R109.2@6178.08,4881.65 ; R117.2@6094.44,4882.64 6177.13,4895.24 R117.2@6094.45,4882.64 ; R117.2@6094.44,4882.64 6176.81,4868.08 R117.2@6094.45,4882.64 ; R117.2@6094.45,4882.64 R109.2@6178.08,4881.65 ; R117.2@6094.71,4870.49 R109.2@6178.08,4881.65 ; R117.2@6095.09,4894.74 R109.2@6178.08,4881.65 ; 6116.72,4846.94 6084.95,4882.64 R109.2@6168.57,4882.64
NetIC2_7: IC2.7 R107.1 R116.2 | length 2002.1
  Top Layer w20: R107.1@5881.01,4885.65 R116.2@5982.01,4885.64 ; R107.1@5884.09,4872.05 R116.2@5968.11,4873.53 ; R107.1@5884.09,4899.24 R116.2@5968.11,4897.76 ; R107.1@5888,4872.37 R116.2@5968.11,4897.76 ; R107.1@5888,4898.92 R116.2@5968.11,4873.53 ; R116.2@5974.95,4877.61 6034.81,4807.22 ; R116.2@5976.97,4872.07 R107.1@5894.46,4885.64 ; R116.2@5976.97,4899.22 R107.1@5894.46,4885.64 ; R116.2@5978.08,4885.64 R107.1@5894.46,4885.64 ; R116.2@5985.95,4885.64 6034.81,4807.22 ; R116.2@5998.01,4891.98 6034.81,4807.22 ; IC2.7@6066.72,4712.05 6066.72,4775.31 ; IC2.7@6066.72,4745.05 6066.72,4775.31 ; R107.1@5884.95,4885.65 R116.2@5968.57,4885.64 ; R107.1@5884.95,4885.65 R116.2@5968.11,4897.76 ; R107.1@5884.95,4885.65 R116.2@5968.11,4873.53 ; R107.1@5884.95,4885.65 R116.2@5968.57,4885.64 ; R116.2@5968.57,4885.64 5886.06,4872.07 R116.2@5968.57,4885.64 ; R116.2@5968.57,4885.64 5886.06,4899.22 R116.2@5968.57,4885.64 ; 5982.01,4860.02 R116.2@5982.01,4885.64 ; 5982.01,4860.02 5968.88,4882.02 5982.01,4860.02 ; 5982.01,4860.02 5995.15,4882.02 5982.01,4860.02 ; 5982.01,4860.02 6066.72,4775.31 ; 5982.01,4860.02 R116.2@5982.01,4885.64
NetIC3_6: IC3.6 R112.2 R119.2 | length 1752.1
  Top Layer w20: R119.2@5670.24,4876.17 5708.22,4853.44 ; R119.2@5680.06,4873.07 R112.2@5762.57,4886.65 ; R119.2@5680.06,4900.22 R112.2@5762.57,4886.65 ; R119.2@5690.44,4893.97 5708.22,4853.44 ; IC3.6@5708.22,4712.05 5708.22,4853.44 ; IC3.6@5708.22,4745.05 5708.22,4817.05 ; R112.2@5770.05,4873.36 R119.2@5689.88,4898.61 ; R112.2@5770.05,4899.93 R119.2@5689.88,4874.68 ; R112.2@5773.92,4873.05 R119.2@5689.88,4874.68 ; R112.2@5773.92,4900.24 R119.2@5689.88,4898.61 ; R112.2@5777.02,4886.64 R119.2@5675.02,4886.65 5708.22,4853.44 ; R119.2@5689.46,4886.65 R112.2@5773.08,4886.64 ; R119.2@5689.46,4886.65 5771.97,4900.22 R119.2@5689.46,4886.65 ; R119.2@5689.46,4886.65 5771.97,4873.07 R119.2@5689.46,4886.65 ; R119.2@5689.46,4886.65 R112.2@5773.08,4886.64 ; R119.2@5689.88,4874.68 R112.2@5773.08,4886.64 ; R119.2@5689.88,4898.61 R112.2@5773.08,4886.64 ; 5708.22,4853.44 5678.95,4886.65 R112.2@5762.57,4886.65
NetIC3_7: IC3.7 R110.1 R118.2 | length 1893
  Top Layer w20: R110.1@5472.02,4886.64 R118.2@5575.02,4886.65 5575.02,4882.01 5658.22,4798.81 ; R110.1@5475.14,4873.05 R118.2@5559.2,4874.84 ; R110.1@5475.14,4900.24 R118.2@5559.2,4898.45 ; R110.1@5478.95,4873.36 R118.2@5559.2,4898.45 ; R110.1@5478.95,4899.93 R118.2@5559.2,4874.84 ; R118.2@5569.4,4876.93 5638.2,4818.84 ; R118.2@5569.97,4873.07 R110.1@5487.46,4886.64 ; R118.2@5569.97,4900.22 R110.1@5487.46,4886.64 ; R118.2@5571.08,4886.65 R110.1@5487.46,4886.64 ; R118.2@5578.95,4886.65 5638.2,4818.84 ; R118.2@5589.86,4894.81 5638.2,4818.84 ; IC3.7@5658.22,4712.05 5658.22,4798.81 ; IC3.7@5658.22,4745.05 5658.22,4798.81 ; R110.1@5475.95,4886.64 R118.2@5559.57,4886.65 ; R110.1@5475.95,4886.64 R118.2@5559.2,4898.45 ; R110.1@5475.95,4886.64 R118.2@5559.2,4874.84 ; R110.1@5475.95,4886.64 R118.2@5559.57,4886.64 ; R118.2@5559.57,4886.65 5477.06,4873.07 R118.2@5559.57,4886.64 ; R118.2@5559.57,4886.65 5477.06,4900.22 R118.2@5559.57,4886.64
NetIC4_6: IC4.6 R115.2 R121.2 | length 2170.8
  Top Layer w20: R121.2@5259.15,4881.99 5299.72,4790.46 ; R121.2@5273.06,4873.07 R115.2@5355.57,4886.65 ; R121.2@5273.06,4900.22 R115.2@5355.57,4886.65 ; R121.2@5285.27,4889.53 5299.72,4790.46 ; IC4.6@5299.72,4712.05 5299.72,4854.94 ; IC4.6@5299.72,4745.05 5299.72,4817.05 ; R115.2@5362.03,4873.37 R121.2@5281.92,4898.77 ; R115.2@5362.03,4899.92 R121.2@5281.92,4874.53 ; R115.2@5365.94,4873.05 R121.2@5281.92,4874.53 ; R115.2@5365.94,4900.24 R121.2@5281.92,4898.77 ; R115.2@5369.02,4886.64 R121.2@5268.02,4886.65 5299.72,4854.94 ; R121.2@5271.95,4886.65 5299.72,4790.46 ; R121.2@5271.95,4886.65 5299.72,4854.94 ; R121.2@5271.95,4886.65 5299.72,4854.94 ; R121.2@5271.95,4886.65 R115.2@5355.57,4886.65 ; R121.2@5281.46,4886.65 R115.2@5365.08,4886.64 ; R121.2@5281.46,4886.65 5363.97,4900.22 R121.2@5281.46,4886.65 ; R121.2@5281.46,4886.65 5363.97,4873.07 R121.2@5281.46,4886.65 ; R121.2@5281.46,4886.65 R115.2@5365.08,4886.64 ; R121.2@5281.92,4874.53 R115.2@5365.08,4886.64 ; R121.2@5281.92,4898.77 R115.2@5365.08,4886.64 ; 5299.72,4854.94 5263.29,4876.13 5299.72,4854.94 ; 5299.72,4854.94 5283.52,4893.85 5299.72,4854.94
NetIC4_7: IC4.7 R113.1 R120.2 | length 1893
  Top Layer w20: R113.1@5068.02,4881.64 5070.01,4879.65 5167.02,4879.65 5167.02,4865.01 5249.72,4782.31 ; R113.1@5070.98,4873.06 R120.2@5155.69,4873.81 ; R113.1@5071.15,4900.24 R120.2@5156.97,4898.48 ; R113.1@5071.92,4873.02 R120.2@5156.07,4879.65 ; R113.1@5072.93,4873.06 R120.2@5156.96,4885.92 ; R113.1@5073.16,4900.21 R120.2@5156.96,4885.92 ; R113.1@5074.17,4900.08 R120.2@5156.07,4879.65 ; R113.1@5074.9,4873.34 R120.2@5156.97,4898.48 ; R113.1@5075.09,4899.9 R120.2@5155.69,4873.81 ; R120.2@5162.61,4878.46 5224.14,4807.89 ; R120.2@5163.4,4900.09 R113.1@5081.49,4879.65 ; R120.2@5165.62,4886.65 R113.1@5081.49,4879.65 ; R120.2@5165.65,4873.02 R113.1@5081.49,4879.65 ; R120.2@5173.5,4886.65 5224.14,4807.89 ; R120.2@5185.46,4893.16 5224.14,4807.89 ; IC4.7@5249.72,4712.05 5249.72,4782.31 ; IC4.7@5249.72,4745.05 5249.72,4782.31 ; R113.1@5071.95,4886.64 R120.2@5156.96,4885.92 ; R113.1@5071.95,4886.64 R120.2@5156.97,4898.48 ; R113.1@5071.95,4886.64 R120.2@5155.69,4873.81 ; R113.1@5071.95,4886.64 R120.2@5156.07,4879.65
NetJ9_5: J9.5 R4.2 | length 1354.6
  Top Layer w20: R4.2@6748.16,2334.61 6761.67,2283.33 ; R4.2@6761.67,2336.36 6761.67,2283.33 ; R4.2@6761.67,2340.3 6761.67,2283.33 ; R4.2@6775.17,2334.61 6761.67,2283.33 ; J9.5@7162.52,2553.77 7253.77,2553.77 ; J9.5@7197.96,2553.77 7253.77,2553.77 ; 6761.67,2283.33 6786,2259 7220,2259 7242,2237 7359,2237 7375.41,2253.41 7375.41,2433.19 7254.3,2554.3 7253.77,2553.77
NetJ9_7: J9.7 R5.2 | length 604.8
  Top Layer w20: R5.2@6971.66,2340.29 7214.66,2340.29 7229.74,2355.37 7229.74,2431.85 7225.93,2435.66 ; R5.2@6972.77,2326.72 7055.29,2340.29 R5.2@6972.77,2353.87 ; J9.7@7162.52,2435.66 7225.93,2435.66 ; J9.7@7197.96,2435.66 7225.93,2435.66
NetJ10_2: J10.2 R6.2 | length 838.7
  Top Layer w10: R6.2@6764.37,4884.85 6822.12,4859.88 ; R6.2@6769.09,4893.73 6822.12,4859.88 ; R6.2@6770.28,4900.66 6781.34,4900.66 6827.39,4854.61 7056.39,4854.61 7094.78,4816.22 ; R6.2@6774.21,4900.66 6822.12,4859.88 ; R6.2@6780.24,4906.83 6822.12,4859.88 ; R6.2@6788.25,4912.9 6822.12,4859.88 ; J10.2@7125.9,4807.52 7094.78,4816.22 ; J10.2@7125.9,4824.92 7094.78,4816.22 ; J10.2@7127.09,4816.22 7094.78,4816.22 ; J10.2@7162.52,4816.22 7094.78,4816.22
NetJ10_4: J10.4 R8.2 | length 590
  Top Layer w10: R8.2@6980.3,4704.67 6986.85,4698.11 J10.4@7162.52,4698.11 ; R8.2@6983.88,4696.05 7038.58,4698.11 ; R8.2@6984.23,4704.67 7038.58,4698.11 ; R8.2@6985.18,4686.07 7038.58,4698.11 ; R8.2@6985.94,4713.12 7038.58,4698.11 ; R8.2@6989.58,4722.5 7038.58,4698.11 ; J10.4@7126.21,4689.37 7083.31,4698.11 ; J10.4@7126.21,4706.84 7083.31,4698.11 ; J10.4@7127.09,4698.11 7083.31,4698.11
NetJ11_2: J11.2 R7.2 | length 657.2
  Top Layer w20: J11.2@-111.93,4757.16 -51.84,4757.16 ; J11.2@-76.5,4757.16 -51.84,4757.16 ; R7.2@94.25,4950.09 11.74,4963.67 ; R7.2@94.25,4977.24 11.74,4963.67 ; R7.2@95.36,4963.67 11.74,4963.67 ; R7.2@99.29,4963.67 9.67,4963.67 -25,4929 -25,4784 -51.84,4757.16
NetJ11_4: J11.4 R29.2 | length 865.2
  Top Layer w20: R29.2@299.46,4956.34 279,5022 ; R29.2@312,4961.67 279,5022 ; R29.2@315.94,4961.67 315.94,4985.06 279,5022 ; R29.2@323.25,4969.35 279,5022 ; J11.4@-111.93,4875.27 -93.73,4893.48 ; J11.4@-111.93,4875.27 -93.73,4947.27 ; J11.4@-111.93,4875.27 -93.73,4893.48 ; -93.73,4893.48 -93.73,4947.27 ; -93.73,4947.27 -19,5022 279,5022
NetJ14_15: J14.15 R54.1 | length 950.7
  Top Layer w20: R54.1@2324.54,3490.33 2393.94,3571.94 ; R54.1@2342.23,3478.12 2393.94,3571.94 ; R54.1@2362,3469.68 2393.94,3571.94 ; J14.15@2468.48,3724.27 2482.03,3660.03 ; J14.15@2482.03,3725.69 2482.03,3660.03 ; J14.15@2495.57,3724.27 2482.03,3660.03 ; 2338.3,3516.3 R54.1@2338.3,3478.12 2338.3,3516.3 ; 2338.3,3516.3 2358.92,3484.17 2338.3,3516.3 ; 2338.3,3516.3 2317.67,3484.17 2338.3,3516.3 ; 2338.3,3516.3 2482.03,3660.03
NetJ14_17: J14.17 R58.1 | length 526.3
  Top Layer w20: J14.17@2547.19,3724.58 2560.77,3642.06 J14.17@2574.34,3724.58 ; J14.17@2560.77,3725.69 2560.77,3558.99 2592.45,3527.31 ; R58.1@2571.48,3482.82 2592.45,3527.31 ; R58.1@2592.45,3478.12 2592.45,3527.31 ; R58.1@2613.43,3482.82 2592.45,3527.31
NetJ14_23: J14.23 R38.1 | length 851.6
  Top Layer w10: J14.23@2778.65,3722.45 2796.99,3672.06 ; J14.23@2788.39,3724.99 2796.99,3672.06 ; J14.23@2796.99,3725.69 2796.99,3672.01 2846.61,3622.39 R38.1@2846.61,3478.12 ; J14.23@2805.58,3724.99 2796.99,3672.06 ; J14.23@2815.33,3722.45 2796.99,3672.06 ; R38.1@2820.73,3483.83 2846.61,3539.61 ; R38.1@2830.26,3480.33 2846.61,3539.61 ; R38.1@2840.12,3478.46 2846.61,3539.61 ; R38.1@2853.1,3478.46 2846.61,3539.61 ; R38.1@2862.96,3480.33 2846.61,3539.61 ; R38.1@2872.48,3483.83 2846.61,3539.61
NetJ14_25: J14.25 R43.1 | length 779.8
  Top Layer w10: J14.25@2857.39,3722.45 2875.73,3672.06 ; J14.25@2867.13,3724.99 2875.73,3672.06 ; J14.25@2875.73,3725.69 2875.73,3622.27 2973.69,3524.31 ; J14.25@2884.32,3724.99 2875.73,3672.06 ; J14.25@2894.07,3722.45 2875.73,3672.06 ; R43.1@2948.3,3485.72 2973.69,3524.31 ; R43.1@2957.46,3481.06 2973.69,3524.31 ; R43.1@2967.21,3478.57 2973.69,3524.31 ; R43.1@2973.69,3478.12 2973.69,3524.31 ; R43.1@2980.17,3478.57 2973.69,3524.31 ; R43.1@2989.92,3481.06 2973.69,3524.31 ; R43.1@2999.07,3485.72 2973.69,3524.31
NetJ14_27: J14.27 R52.1 | length 807.5
  Top Layer w10: J14.27@2936.7,3720.12 2954.47,3694.53 ; J14.27@2945.93,3724.49 2954.47,3694.53 ; J14.27@2954.47,3725.69 2954.47,3694.53 ; J14.27@2963.01,3724.49 2954.47,3694.53 ; J14.27@2972.24,3720.12 2954.47,3694.53 ; R52.1@3079.13,3479.83 3105,3535.61 ; R52.1@3088.65,3476.33 3105,3535.61 ; R52.1@3098.51,3474.46 3105,3535.61 ; R52.1@3105,3474.12 3105,3544 2954.47,3694.53 ; R52.1@3111.49,3474.46 3105,3535.61 ; R52.1@3121.35,3476.33 3105,3535.61 ; R52.1@3130.87,3479.83 3105,3535.61
NetJ14_29: J14.29 R57.1 | length 763.3
  Top Layer w20: J14.29@3019.76,3723.52 3033.21,3682.79 ; J14.29@3046.66,3723.52 3033.21,3682.79 ; R57.1@3207.12,3465.28 3160.44,3555.56 ; R57.1@3225.06,3477.12 3160.44,3555.56 ; R57.1@3229,3477.12 3229,3487 3033.21,3682.79 ; R57.1@3240.12,3492.46 3160.44,3555.56 ; 3033.21,3682.79 J14.29@3033.21,3725.69 3033.21,3682.79
NetJ14_35: J14.35 R46.1 | length 905.6
  Top Layer w10: J14.35@3258.34,3710.73 3314.26,3680.85 ; J14.35@3263.76,3719.19 3314.26,3680.85 ; J14.35@3269.43,3725.69 3354.92,3640.19 R46.1@3354.92,3478.12 ; J14.35@3275.92,3731.35 3314.26,3680.85 ; J14.35@3284.39,3736.78 3314.26,3680.85 ; R46.1@3329.05,3483.83 3354.92,3539.61 ; R46.1@3338.57,3480.33 3354.92,3539.61 ; R46.1@3348.43,3478.46 3354.92,3539.61 ; R46.1@3361.41,3478.46 3354.92,3539.61 ; R46.1@3371.27,3480.33 3354.92,3539.61 ; R46.1@3380.8,3483.83 3354.92,3539.61
NetJ14_39: J14.39 R51.1 | length 853.9
  Top Layer w10: J14.39@3408.57,3722.45 3426.91,3672.06 ; J14.39@3418.31,3724.99 3426.91,3672.06 ; J14.39@3426.91,3725.69 3426.91,3609.09 3482,3554 R51.1@3482,3478.12 ; J14.39@3435.5,3724.99 3426.91,3672.06 ; J14.39@3445.25,3722.45 3426.91,3672.06 ; R51.1@3456.13,3483.83 3482,3539.61 ; R51.1@3465.65,3480.33 3482,3539.61 ; R51.1@3475.51,3478.46 3482,3539.61 ; R51.1@3488.49,3478.46 3482,3539.61 ; R51.1@3498.35,3480.33 3482,3539.61 ; R51.1@3507.87,3483.83 3482,3539.61
NetK1_4: K1.4 R22.1 | length 879.3
  Top Layer w30: R22.1@4926.01,3190.3 4926.01,3159.99 ; K1.4@5215.61,2764.2 5215.61,2919.39 5171.68,2963.32 5171.68,3092.32 5136,3128 4958,3128 ; K1.4@5215.61,2783.89 5215.61,2893.57 ; 4926.01,3159.99 R22.1@4926.01,3186.36 ; 4926.01,3159.99 R22.1@4926.01,3186.36 ; 4926.01,3159.99 4958,3128 ; R22.1@4926.01,3186.36 4958,3128
NetK1_5: K1.5 R21.1 | length 353.3
  Top Layer w30: R21.1@5130.07,3184.36 5215.61,3111.39 ; R21.1@5130.07,3188.3 5138.7,3188.3 5215.61,3111.39 ; K1.5@5215.61,3039.8 5215.61,3111.39 ; K1.5@5215.61,3059.48 5215.61,3111.39
NetL1_2: L1.2 U2.2 U2.4 | length 919
  Top Layer w50: 5036.3,2143.02 U2.2@5036.3,2314.67 ; U2.2@5036.3,2335.34 U2.4@5036.3,2091.25 5108.34,2163.3 ; U2.4@5062.87,2091.25 5108.34,2163.3 ; 5108.34,2163.3 L1.2@5266.43,2163.3 5108.34,2163.3
NetQ1_1: Q1.1 R122.1 | length 606.3
  Top Layer w20: R122.1@6669.34,2614.3 Q1.1@6670.15,2527.07 ; R122.1@6669.5,2596.38 Q1.1@6670.15,2516.7 ; Q1.1@6678.02,2516.7 R122.1@6691.3,2594.64 ; R122.1@6680.35,2595.99 Q1.1@6670.15,2516.7 ; R122.1@6682.93,2613.36 Q1.1@6670.15,2527.07 ; R122.1@6682.93,2617.3 6670.15,2604.52 Q1.1@6670.15,2516.7 ; R122.1@6696.2,2610.32 Q1.1@6670.15,2527.07
NetQ2_1: Q2.1 R123.1 | length 602.9
  Top Layer w20: R123.1@6879.34,2619.3 Q2.1@6880.15,2532.12 ; R123.1@6879.47,2604.38 Q2.1@6880.15,2524.7 ; Q2.1@6888.02,2524.7 R123.1@6902.11,2602.27 ; R123.1@6890.78,2603.89 Q2.1@6880.15,2524.7 ; R123.1@6892.92,2618.36 Q2.1@6880.15,2532.12 ; R123.1@6892.92,2622.3 6880.15,2609.52 Q2.1@6880.15,2524.7 ; R123.1@6906.2,2615.32 Q2.1@6880.15,2532.12
NetR1_1: R1.1 U6.10 | length 696.1
  Top Layer w20: R1.1@342.7,1346.9 415.47,1277.53 ; U6.10@344.42,1094.5 396.5,1094.5 ; R1.1@355.17,1360.78 355.17,1337.83 426,1267 426,1124 396.5,1094.5 ; R1.1@359.11,1360.78 415.47,1277.53 ; U6.10@361.94,1094.5 396.5,1094.5 ; R1.1@378.1,1370.86 415.47,1277.53
NetR2_2: R2.2 R3.2 U1.4 | length 1020.9
  Top Layer w50: R3.2@5613.53,2568.21 5621.3,2431.3 R3.2@5621.3,2556.51 ; R3.2@5609.6,2568.21 5507.23,2568.21 5605.66,2568.21 R2.2@5503.3,2568.21 R3.2@5609.6,2568.21 ; R3.2@5609.6,2568.21 U1.4@5621.3,2396.3 R3.2@5621.3,2556.51 ; R3.2@5609.6,2568.21 R3.2@5621.3,2556.51
NetR30_1: R30.1 U3.1 | length 318.2
  Top Layer w30: R30.1@5456.8,3295.9 5456.8,3300.87 5511.17,3355.24 ; U3.1@5511.17,3455.9 5511.17,3355.24 ; U3.1@5511.17,3490.9 5511.17,3355.24
NetR35_2: R35.2 R36.1 U3.2 | length 900.6
  Top Layer w30: U3.2@5577.84,3455.9 5577.84,3396.75 ; U3.2@5577.84,3490.9 5577.84,3396.75 ; 5577.84,3396.75 R35.2@5642.93,3302.23 ; 5577.84,3396.75 5642.93,3331.67 ; R35.2@5642.93,3298.3 5642.93,3186.23 5642.93,3294.36 R36.1@5642.93,3182.3 R35.2@5642.93,3298.3 ; R35.2@5642.93,3298.3 5642.93,3331.67 ; R35.2@5642.93,3302.23 5642.93,3331.67 ; R35.2@5642.93,3302.23 5642.93,3331.67
NetR37_1: R37.1 U6.15 | length 868.8
  Top Layer w20: U6.15@344.42,844.5 423.5,844.5 ; U6.15@361.94,844.5 423.5,844.5 ; R37.1@459.65,1363.36 481,1274.39 R37.1@502.35,1363.36 ; R37.1@481,1365.88 481,902 423.5,844.5
NetR97_1: R97.1 U5.37 | length 497.5
  Top Layer w10: R97.1@1546.73,4869.74 1607.59,4868.91 ; R97.1@1546.73,4884.29 1562.11,4868.91 1818.21,4868.91 U5.37@1819.15,4867.98 ; R97.1@1548.7,4884.29 1607.59,4868.91 ; R97.1@1554.09,4897.95 1607.59,4868.91 ; 1744.14,4868.91 U5.37@1779.9,4867.98
NetR98_2: R98.2 U5.94 | length 602.5
  Top Layer w10: U5.94@2425.44,4966.4 2663.75,4966.4 2680.86,4949.29 2834.57,4949.29 R98.2@2835.57,4948.29 ; U5.94@2464.69,4966.4 2500.44,4966.4 ; R98.2@2831.14,4933.82 2783.9,4949.29 ; R98.2@2831.72,4962.86 2783.9,4949.29 ; R98.2@2833.6,4948.29 2783.9,4949.29
NRST: C89.1 J2.7 R99.2 U5.14 | length 3245.7
  Top Layer w10: U5.14@2102.61,5112.19 2102.61,5085.61 ; U5.14@2102.61,5190.69 2102.61,5226.44 ; v1@2105.11,5278.49 2102.61,5228.45 ; v1@2124.39,5273.57 2102.61,5228.45 ; v1@2232.79,5280.54 2253,5287 ; v1(2238,5272) 2253,5287 ; v1@2246.54,5266.79 2253,5287 ; v1@2289.89,4778.06 2246,4788 v1@2289.89,4797.94 ; v1(2291,4788) 2099,4788 2058,4829 2058,5041 2102.61,5085.61 ; R99.2@2300.87,5427.12 2271.4,5378.96 ; R99.2@2312.3,5417.89 2271.4,5378.96 ; R99.2@2314.09,5405.29 2362.01,5418.57 ; R99.2@2314.84,5434.33 2362.01,5418.57 ; R99.2@2320.95,5406.03 2271.4,5378.96 ; C89.1@2394.83,5404.04 2347.32,5418.57 C89.1@2394.83,5433.09 ; C89.1@2397,5418.57 2313.59,5418.57 R99.2@2312.3,5419.86 ; 2102.61,5085.61 U5.14@2102.61,5151.44 2102.61,5264.61 v1(2115,5277) 2102.61,5228.45 ; 2253,5287 2253,5360.57 R99.2@2312.3,5419.86 ; R99.2@2312.3,5419.86 2362.01,5418.57
  Bottom Layer w10: v1(2115,5277) 2233,5277 v1(2238,5272) 2192.08,5277 ; v1@2116.11,5267.06 2160,5277 v1@2116.11,5286.94 ; v1@2235.85,5262.23 2192.08,5277 ; v1@2238,5282 2192.08,5277 ; v1(2291,4788) 2336.11,4790 ; v1@2291,4790 2455,4790 2618.15,4626.85 J2.7@2618.15,4228 ; v1@2291.67,4797.98 2336.11,4790 ; v1@2292.55,4778.12 2336.11,4790 ; J2.7@2599.81,4231.23 2618.15,4281.62 ; J2.7@2609.56,4228.69 2618.15,4281.62 ; J2.7@2626.74,4228.69 2618.15,4281.62 ; J2.7@2636.49,4231.23 2618.15,4281.62